# EAGLE board ATX_Power_Breakout_v1p2 (EAGLE 9.5.1)
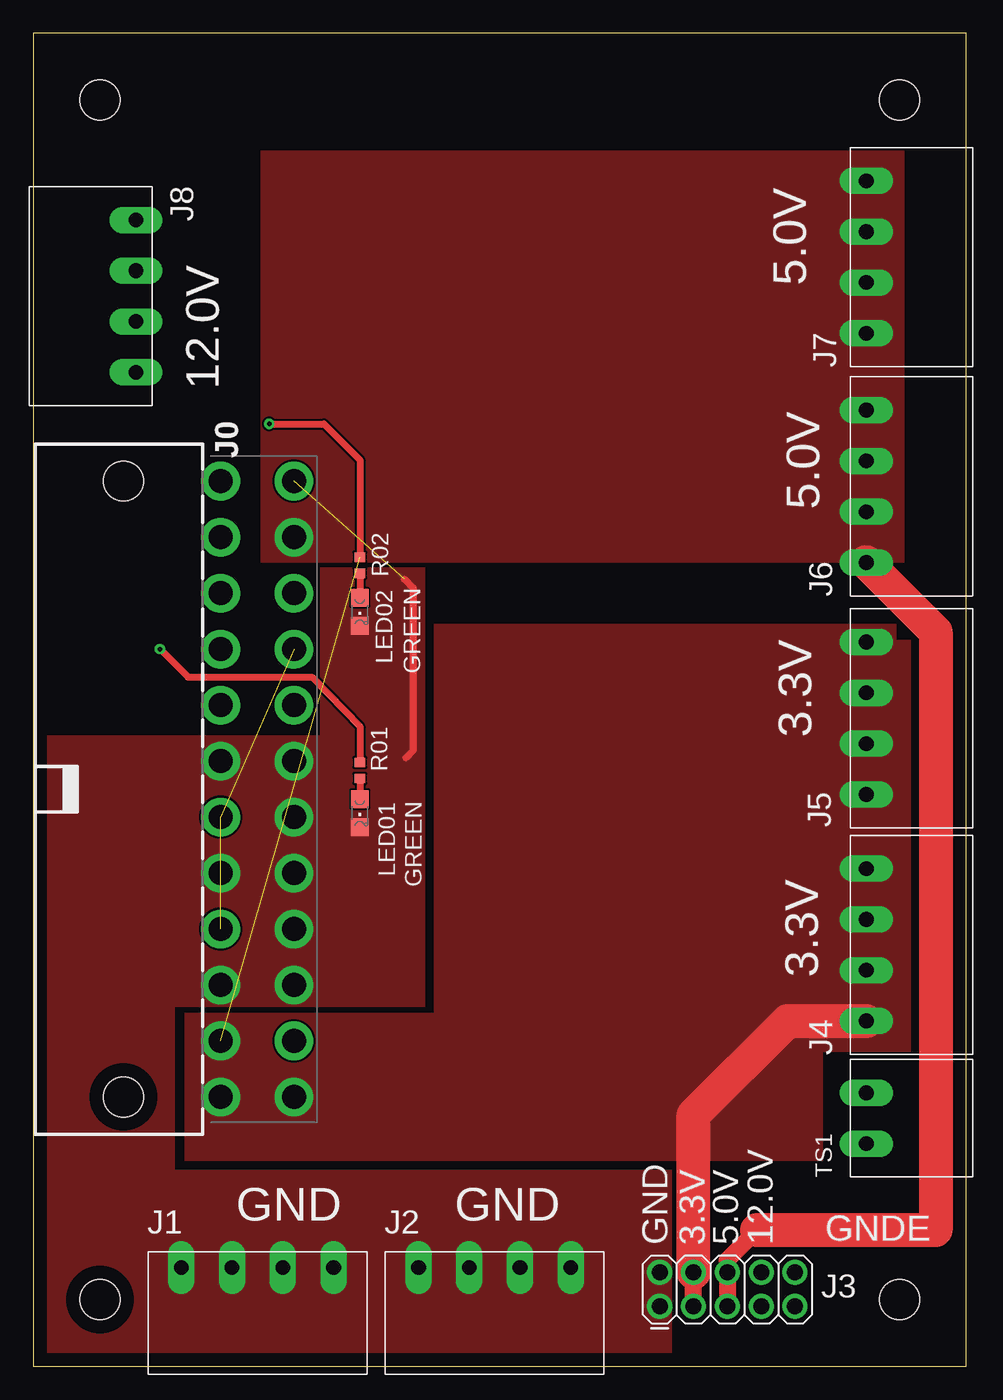
[diagram p0: board, top side]
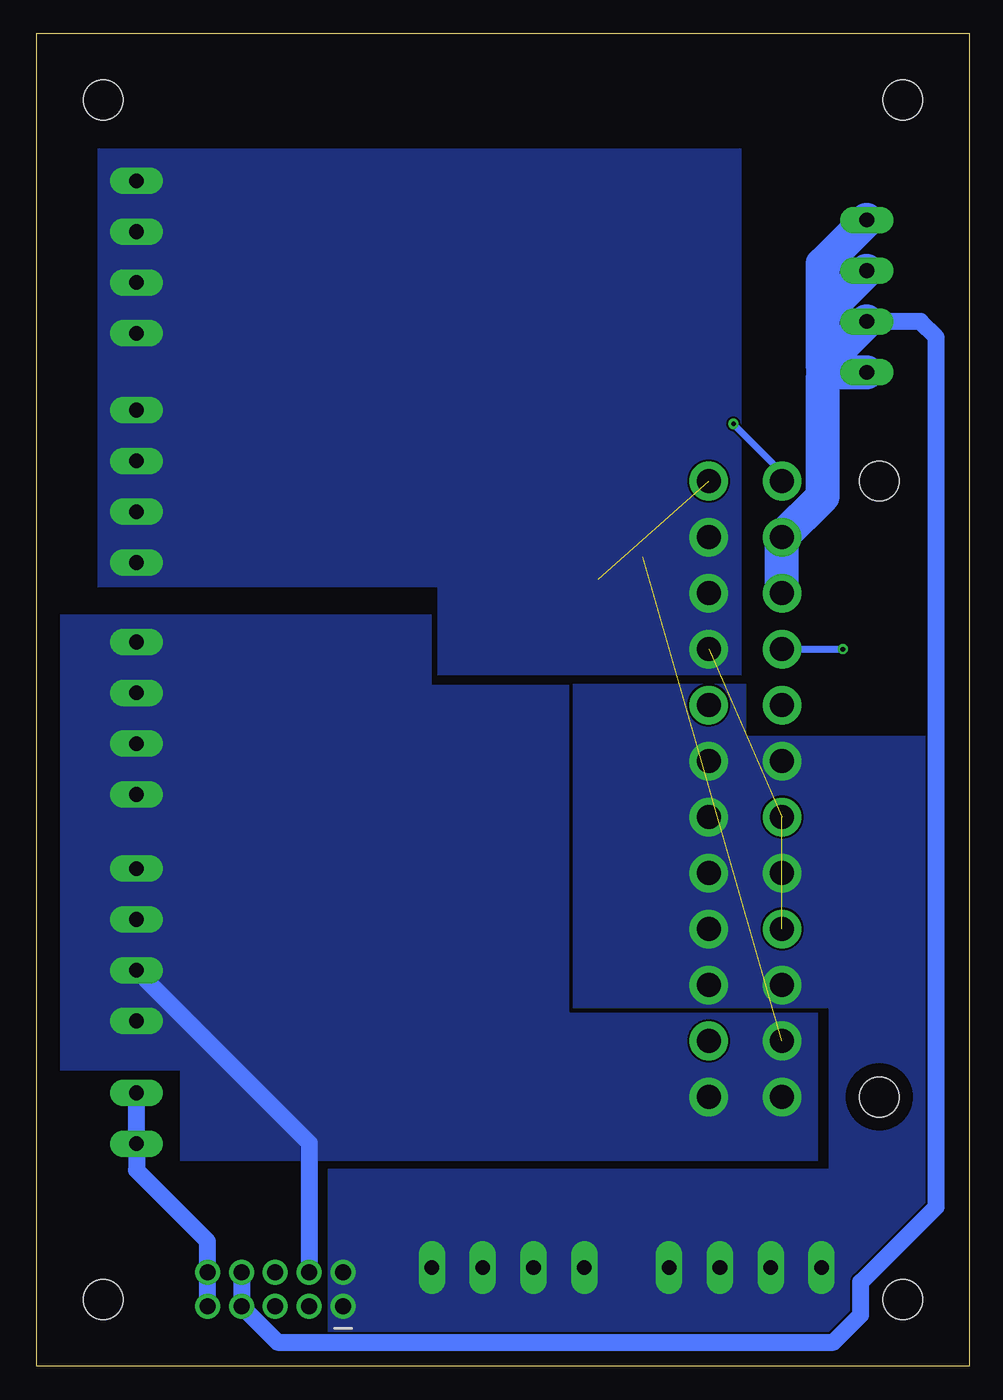
[diagram p1: board, bottom side, seen from below]

Size 70 x 100 mm. Coordinates in mm from the lower left corner, seen from the top.
Outline: 0,0 70,0 70,100 0,100 0,0
Copper layers (1*16): Top 0.035mm / dielectric 1.5mm / Bottom 0.035mm
Design rules "default": minimum track width 6mil, minimum drill 0.35mm, track to track 6mil, track to pad 6mil, pad to pad 6mil, via to via 6mil, smd to smd 6mil, copper to edge 40mil, drill to drill 6mil, minimum pad ring 10mil, minimum via ring 8mil, stop-mask expansion 4mil, vias tented up to drill 0mil, thermal gap 10mil
Holes 3 mm at 5,95 5,5 65,5 65,95

## Footprints (pad centres in the part's own frame; a part is rotated, then mirrored left to right if it is on the bottom)
ATX24_RIGHT_ANGLE = drill 1.8 pad 2.9: 1 23.1,4.76; 2 18.9,4.76; 3 14.7,4.76; 4 10.5,4.76; 5 6.3,4.76; 6 2.1,4.76; 7 -2.1,4.76; 8 -6.3,4.76; 9 -10.5,4.76; 10 -14.7,4.76; 11 -18.9,4.76; 12 -23.1,4.76; 13 23.1,10.26; 14 18.9,10.26; 15 14.7,10.26; 16 10.5,10.26; 17 6.3,10.26; 18 2.1,10.26; 19 -2.1,10.26; 20 -6.3,10.26; 21 -10.5,10.26; 22 -14.7,10.26; 23 -18.9,10.26; 24 -23.1,10.26 | hole 3: -23.1,-2.54; 23.1,-2.54
1X4_3.81MM_PITCH = drill 1.1 pad 2 long: P$1 0,0; P$2 3.81,0; P$3 7.62,0; P$4 11.43,0
2X5 = drill 1.2 pad 1.88: 1 0,0; 2 0,2.54; 3 2.54,0; 4 2.54,2.54; 5 5.08,0; 6 5.08,2.54; 7 7.62,0; 8 7.62,2.54; 9 10.16,0; 10 10.16,2.54
LED_0805_GREEN = smd 1.3 x 1.3: A 0,-1.05; C 0,1.05
0402 = smd 0.8 x 0.7: P$1 0,0.6; P$2 0,-0.6
1X2_3.81MM_PITCH = drill 1.1 pad 2 long: P$1 0,0; P$2 3.81,0

## Placement (x,y rotation side)
J0  ATX24RH  [ATX24_RIGHT_ANGLE]  9.3,43.3 270 top
J1  [1X4_3.81MM_PITCH]  11.1,7.4 0 top
J2  [1X4_3.81MM_PITCH]  28.9,7.4 0 top
J3  [2X5]  47,4.5 0 top
J4  [1X4_3.81MM_PITCH]  62.5,25.9 90 top
J5  [1X4_3.81MM_PITCH]  62.5,42.9 90 top
J6  [1X4_3.81MM_PITCH]  62.5,60.3 90 top
J7  [1X4_3.81MM_PITCH]  62.5,77.5 90 top
J8  [1X4_3.81MM_PITCH]  7.7,86 270 top
LED01  GREEN  [LED_0805_GREEN]  24.5,41.5 180 top
LED02  GREEN  [LED_0805_GREEN]  24.5,56.6 180 top
R01  470  [0402]  24.5,44.7 180 top
R02  470  [0402]  24.5,60.1 180 top
TS1  [1X2_3.81MM_PITCH]  62.5,16.7 90 top

## Library data of the parts
J0 = 3D_MIG_Controller; PROD_ID: CONN-09674; SF_ID: PRT-09498
J1 J2 J4-J8 LED01 LED02 R01 R02 TS1 = 3D_MIG_Controller
J3 = 3D_MIG_Controller; PROD_ID: CONN-08499; SF_ID: PRT-0778

## Nets
GND: J0.3 J0.5 J0.7 J0.15 J0.16 J0.17 J0.18 J0.19 J0.24 J1.P$1 J1.P$2 J1.P$3 J1.P$4 J2.P$1 J2.P$2 J2.P$3 J2.P$4 J3.1 J3.2 LED01.C LED02.C
GNDE: J3.9 J3.10 TS1.P$1 TS1.P$2
N$4: LED01.A R01.P$1
N$5: LED02.A R02.P$1
NC: J0.20
PWR_OK: J0.8
V-12: J0.14
VDD: J0.1 J0.2 J0.12 J0.13 J3.3 J3.4 J4.P$1 J4.P$2 J4.P$3 J4.P$4 J5.P$1 J5.P$2 J5.P$3 J5.P$4 R02.P$2
VDD5: J0.4 J0.6 J0.21 J0.22 J0.23 J3.5 J3.6 J6.P$1 J6.P$2 J6.P$3 J6.P$4 J7.P$1 J7.P$2 J7.P$3 J7.P$4
VDD5SB: J0.9 R01.P$2
VDD12: J0.10 J0.11 J3.7 J3.8 J8.P$1 J8.P$2 J8.P$3 J8.P$4

## Tracks (layer width: path | path; a pad name or v marks a point on that pad's centre or on a via)
GND  (1 unrouted)
  Top 0.508: 27.95,45.65 28.5,46.2 28.5,58.4 27.85,59.05
  pour Top (no thermals): 11.9,27 29.4,27 29.4,59.9 21.5,59.9 21.5,47.3 0,47.3 0,-0.4 47.9,-0.4 47.9,14.7 10.6,14.7 10.6,25.6 10.6,27
  pour Bottom (no thermals): 48.1,0 48.1,14.8 41.8,14.8 10.5,14.8 10.5,26.9 29.7,26.9 29.7,27.3 29.7,51.2 16.8,51.2 16.8,47.3 0,47.3 0,0
GNDE
  Bottom 1.27: J3.9 J3.10 57.16,9.36 62.5,14.7 TS1.P$1 TS1.P$2
N$4
  Top 0.508: R01.P$1 LED01.A
N$5
  Top 0.508: R02.P$1 LED02.A
VDD  (via drill 0.35)  (1 unrouted)
  Top 0.508: v17.7,70.7 21.8,70.7 24.5,68 R02.P$2
  Top 1.27: J3.3 J3.4
  Top 2.54: J3.4 49.54,18.84 56.6,25.9 J4.P$1
  Bottom 0.508: J0.12 14.06,67.06 v17.7,70.7
  Bottom 1.27: J4.P$2 49.54,16.75 J3.4
  pour Top (no thermals): 11.4,15.4 11.4,26.5 30.1,26.5 30.1,55.7 64.7,55.7 64.7,54.5 65.8,54.5 65.8,23.6 59.2,23.6 59.2,15.4
  pour Bottom (no thermals): 11.4,15.4 59.2,15.4 59.2,22.2 68.2,22.2 68.2,56.4 40.4,56.4 40.4,51.1 30.1,51.1 30.1,26.5 11.4,26.5
VDD5  (2 unrouted)
  Top 1.27: 54.3,10.2 52.08,7.98 J3.6 J3.5
  Top 2.54: J6.P$1 67.7,55.1 67.7,10.2 54.3,10.2
  pour Bottom (no thermals): 17.1,91.3 65.4,91.3 65.4,58.5 39.9,58.5 39.9,51.9 17.1,51.9
  pour Top (no thermals): 17.1,91.2 65.3,91.2 65.3,60.3 17.1,60.3
VDD5SB  (via drill 0.35)
  Top 0.508: v9.5,53.8 11.6,51.7 20.9,51.7 24.5,48 R01.P$2
  Bottom 0.508: J0.9 v9.5,53.8
VDD12
  Bottom 1.27: J3.8 J3.7 51.92,1.8 10.2,1.8 8.15,3.85 8.15,6.3 2.5,11.96 2.5,77.2 3.68,78.38 J8.P$3
  Bottom 2.54: J0.10 J0.11 11,65.26 11,74.1 | 11,74.1 10.53,74.57 J8.P$4 | 11,75.08 11,78.89 | 11,78.89 11,82.7 J8.P$1 | J8.P$2 11,78.89 | J8.P$3 11,75.08 | 11,75.08 11,74.1

## Text on the board
tNames: 12.0V | 5.0V | 5.0V | 3.3V | 3.3V | GND | GND | GND | 3.3V | 5.0V | 12.0V | GNDE